# Altium PCB JTAG_connector2.PcbDoc
Units mil, origin at the board's own origin, x right, y up, seen from the top; angles counter-clockwise.
Board outline 1000 x 2000 mil, 2 copper layers (Top Layer, Bottom Layer); 4 components, 7 nets, 30 pads, 7 vias.
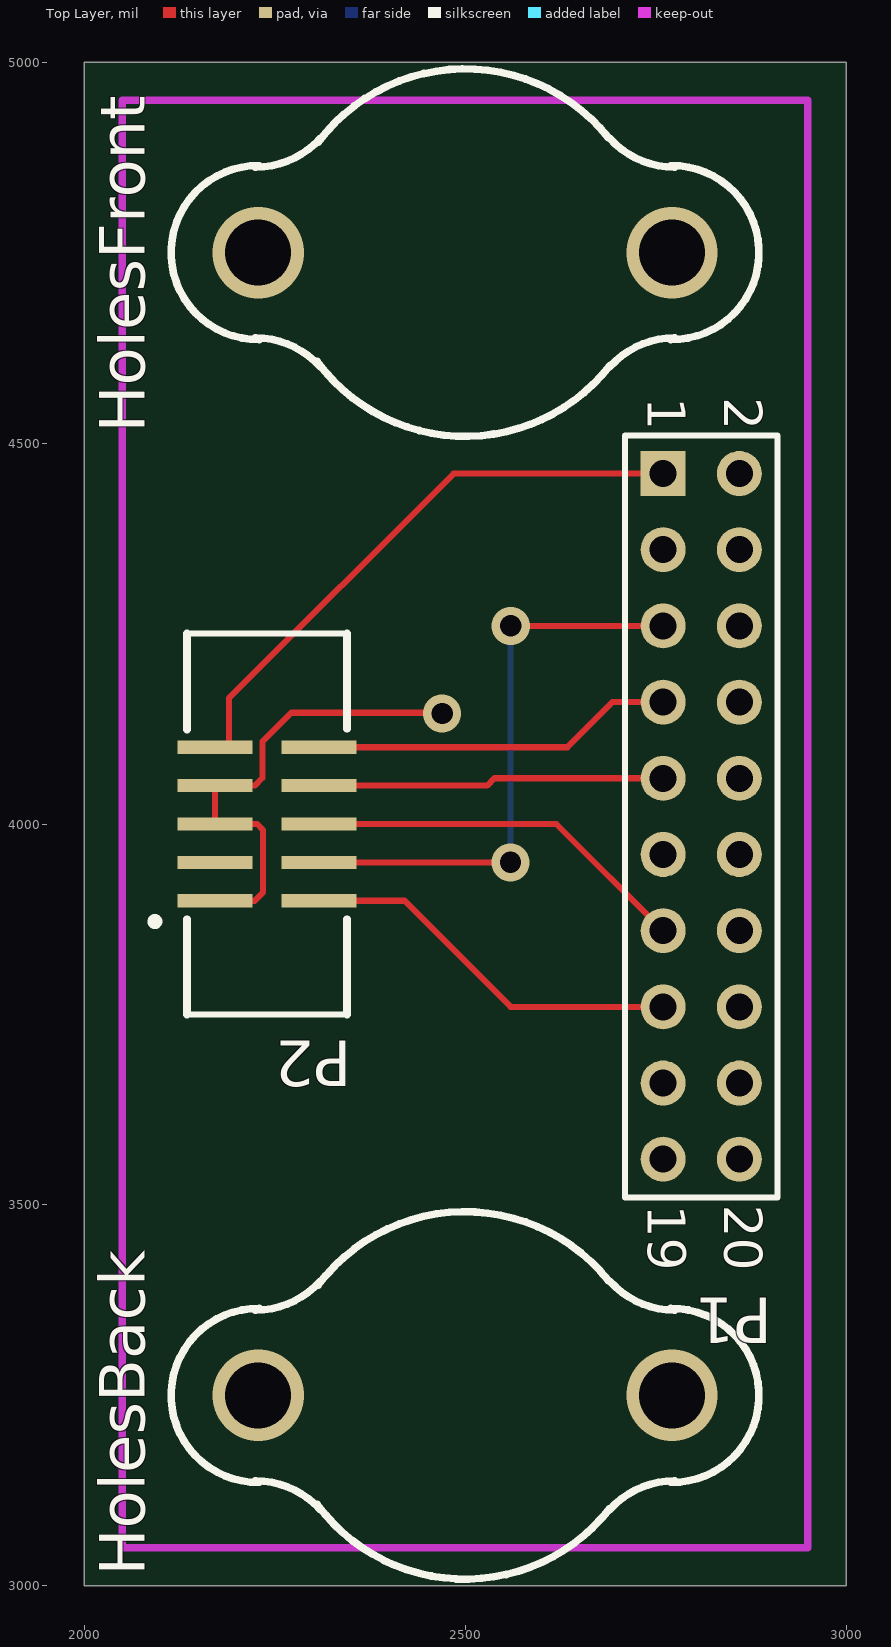
[diagram p0: Top Layer view]
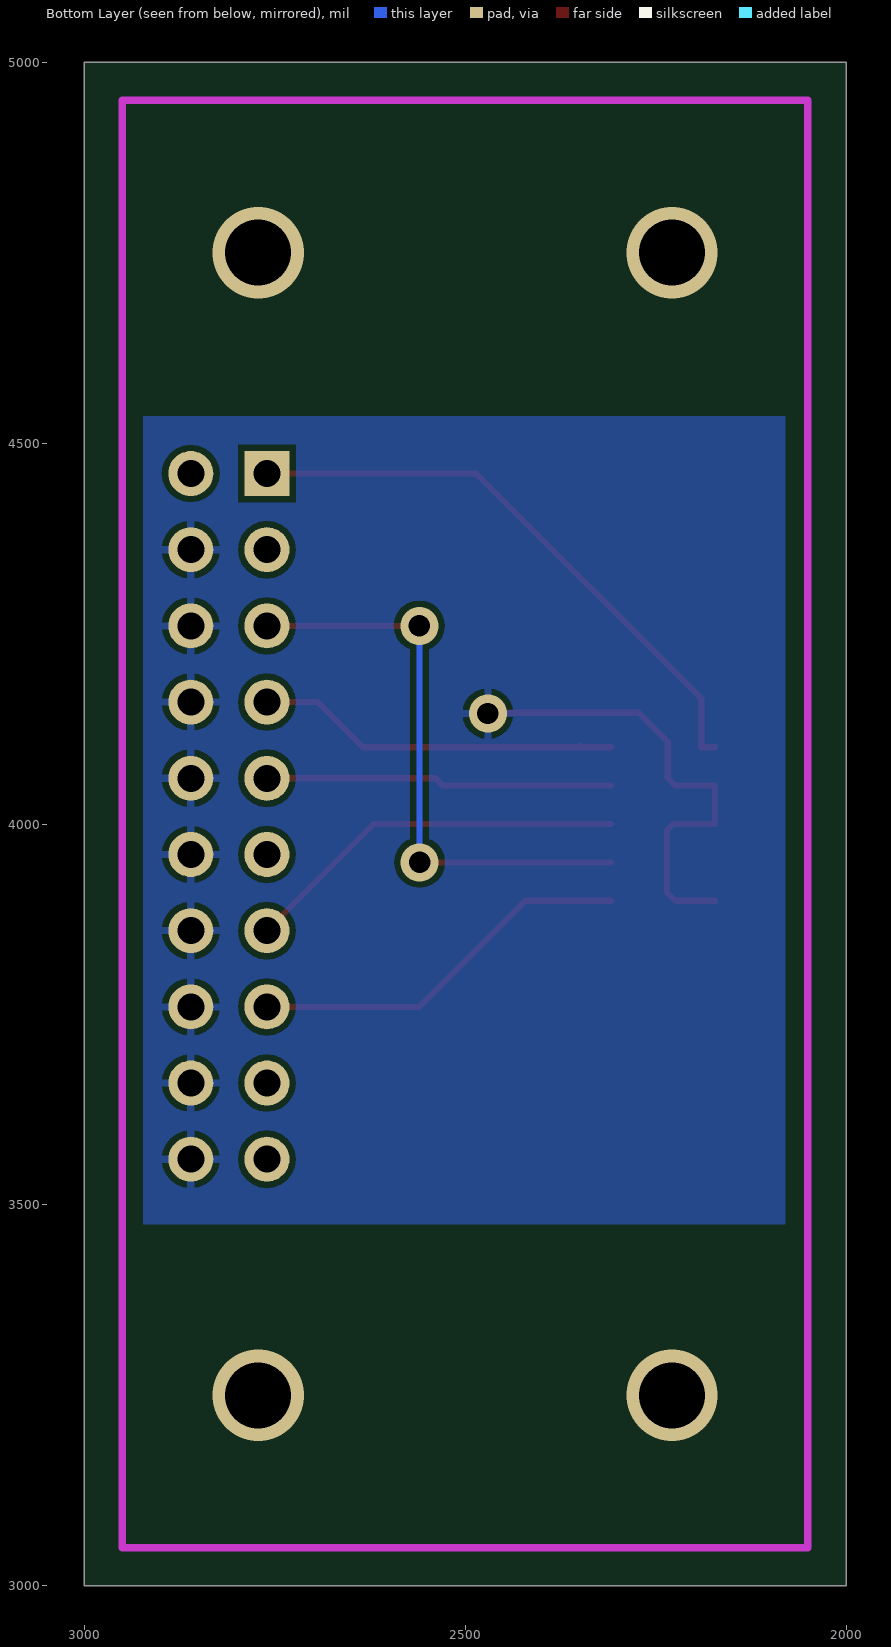
[diagram p1: Bottom Layer view, seen from below]

## Layer stack, top to bottom
Top Layer: signal copper 1.4
Dielectric: dielectric 12.6, FR-4, Dk 4.8
Bottom Layer: signal copper 1.4

## Board outline
2000,3000 3000,3000 3000,5000 2000,5000

## Design rules (kind name [scope] priority, off if disabled: settings)
Clearance [All] p1: gap=8
PolygonConnect [All] p1: connectstyle=Relief reliefconductorwidth=10 reliefentries=4 polygonreliefangle="90 Angle"
RoomDefinition JTAG_connector2 [InComponentClass('JTAG_connector2')] p1: confinementstyle=ConfineIn formatcopy=TRUE lockcomponents=FALSE outline 3045,2960 3595,2960 3595,4235 3045,4235
RoutingVias [All] p1: holewidth=25 width=40 viastyle="Through Hole" minholewidth=28 minwidth=50 maxholewidth=28 maxwidth=50
SilkscreenOverComponentPads [All] p1: minsilkscreentomaskgap=10
SolderMaskExpansion [All] p1: expansion=4
Width [All] p1: maxlimit=8 minlimit=8 preferedwidth=8
27 further rules are at their usual default settings.

## Components (designator, comment, footprint, x,y, rotation, side; value= is the part's Value field where it differs from the comment)
HolesBack "non connect" "3/8\"Caster" 2500,3250 r180 top
HolesFront "non connect" "3/8\"Caster" 2500,4750 r180 top
P1 "Header 10X2" HDR2X10 2760,4460 r270 top
P2 "JTAG10" JTAG-10 2240,4000 r270 top

## Footprints (in the part's own frame and the unit in brackets; to place one, negate y for a bottom-side part, rotate by r counter-clockwise, add the part's x,y. Pads: shape width x height; smd on the part's side, far side on the other; paste and mask are expansions set on the pad)
"3/8\"Caster" [mil] "3/8\" caster for board"
  silkscreen extent -386,-241 386,241
HDR2X10 [mm] "Connector; Header; 10x2 Position"
  rect 1.5x1.5 hole 0.9: 1(0,0)
  round 1.5 hole 0.9: 2(0,2.54) 3(2.54,0) 4(2.54,2.54) 5(5.08,0) 6(5.08,2.54) 7(7.62,0) 8(7.62,2.54) 9(10.16,0) 10(10.16,2.54) 11(12.7,0) 12(12.7,2.54) 13(15.24,0) 14(15.24,2.54) 15(17.78,0) 16(17.78,2.54) 17(20.32,0) 18(20.32,2.54) 19(22.86,0) 20(22.86,2.54)
  silkscreen extent -1.27,-1.27 24.13,3.81
JTAG-10 [mm] "Connector, Socket Strip, Double Row, SMT, 20 Position, Vertical, Pitch 2mm, Body 20 x 4 mm (LxW)"
  rect 0.44x2.5 smd: 1(-2.56,-1.73) 2(-2.56,1.73) 3(-1.28,-1.73) 4(-1.28,1.73) 5(0,-1.73) 6(0,1.73) 7(1.28,-1.73) 8(1.28,1.73) 9(2.56,-1.73) 10(2.56,1.73)
  silkscreen extent -6.35,-3.86 6.35,2.67, body extent -6.35,-2.01 6.35,2.03, height 3.56

## Part data
HolesBack HolesFront: library part Caster, "This is just a space saver to get the caster onto the pcb"
P1: "Header, 20-Pin, Dual row"

## Via types
v1: diameter 120, hole 86.61, Top Layer to Bottom Layer, 4 vias
v2: diameter 50, hole 28, Top Layer to Bottom Layer, 3 vias

## Nets (pads, with @x,y where several pads share a name; then routed paths per layer and width w, separated by ;. In a path a pad name is that pad's centre, name@x,y a point inside that pad or via, vN(x,y) a via of type N, cw(c..) or ccw(c..) an arc to the next point about the centre after c; other vN are vias at no path point)
33V: P1.1 P2.1 | length 774.5
  Top Layer w8: P2.1 2190,4100.79 2190,4165 2485,4460 P1.1
GND: P1.4 P1.6 P1.8 P1.10 P1.12 P1.14 P1.16 P1.18 P1.20 P2.3 P2.5 P2.9 | length 630.9
  Top Layer w8: P2.9 2224,3899.21 2235,3910.21 2235,3992 2227,4000 P2.5 P2.3 2224,4050.39 2234,4060.39 2234,4108 2272,4146 v2@2469,4146
  other v2: 2470,4145
RSTN: P1.15 P2.10 | length 509.6
  Top Layer w8: P2.10 2420.79,3899.21 2560,3760 P1.15
TCK: P1.9 P2.4 | length 455.9
  Top Layer w8: P2.4 2529,4050.39 2538.61,4060 P1.9
TDI: P1.5 P2.8 | length 762.1
  Top Layer w8: P2.8 v2(2559.61,3949.61) ; v2(2560,4260) P1.5
  Bottom Layer w8: v2(2559.61,3949.61) 2559.61,4259.61 v2(2560,4260)
TDO: P1.13 P2.6 | length 509.9
  Top Layer w8: P2.6 2620,4000 P1.13
TMS: P1.7 P2.2 | length 518.5
  Top Layer w8: P2.2@2349,4102 2349,4100.79 P2.2 2634.21,4100.79 2693.42,4160 P1.7
pads on no net: P1.2 P1.3 P1.11 P1.17 P1.19 P2.7
copper on no net:
  other v1: 2228.35,3250 2771.65,3250 2228.35,4750 2771.65,4750

## Polygon pours and split planes (outlines as drawn)
GND on Bottom Layer "Gnd Plane" (solid, remove dead copper, pour order 1000): 2080,3475 2922.5,3475 2922.5,4535 2080,4535

## Keep-outs
Keep-Out Layer:
  lines w10: 2050,3050 2950,3050 2950,4950 2050,4950 2050,3050

## Silkscreen, mask and mechanical layers (free items; w line width, h text height)
Drill Drawing:
  text ".LEGEND" at 3200,3200 h60
  text "Drill Drawing." at 3200,3100 h60

## Dimensions
2050,3050 to 2950,3050 on Mechanical 1
2050,3050 to 2050,4950 on Mechanical 1

## Text inside footprints (layer, text, board x,y; h text height)
P1: Top Overlay "2" at 2840,4560 h50 r270; Top Overlay "1" at 2740,4560 h50 r270; Top Overlay "19" at 2740,3500 h50 r270; Top Overlay "20" at 2840,3500 h50 r270